# Altium PCB lab_1_demcheva_usb_rs232.PcbDoc
Units mm, origin at the board's own origin, x right, y up, seen from the top; angles counter-clockwise.
Board outline 51.05 x 32.13 mm, 4 copper layers (Top Layer, Signal Layer 1, Signal Layer 2, Bottom Layer), stack 1.522 mm thick; 26 components, 23 nets, 112 pads, 208 vias.
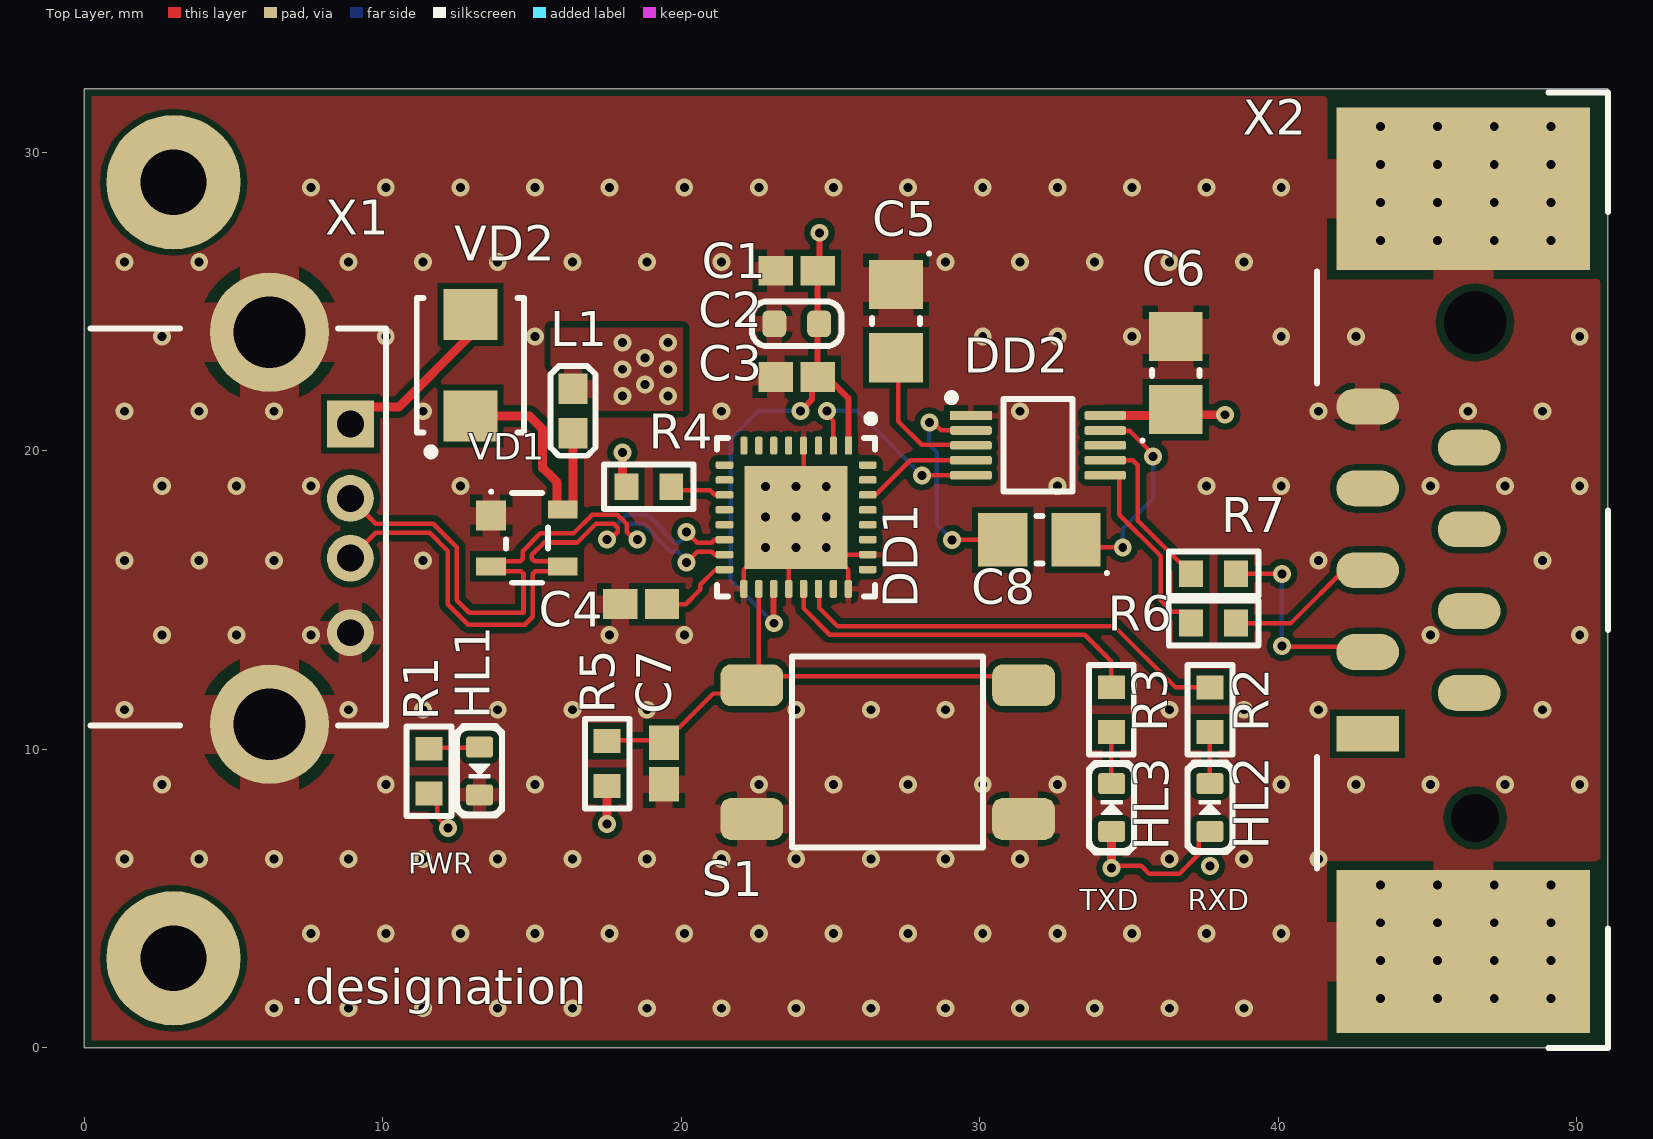
[diagram p0: Top Layer view]
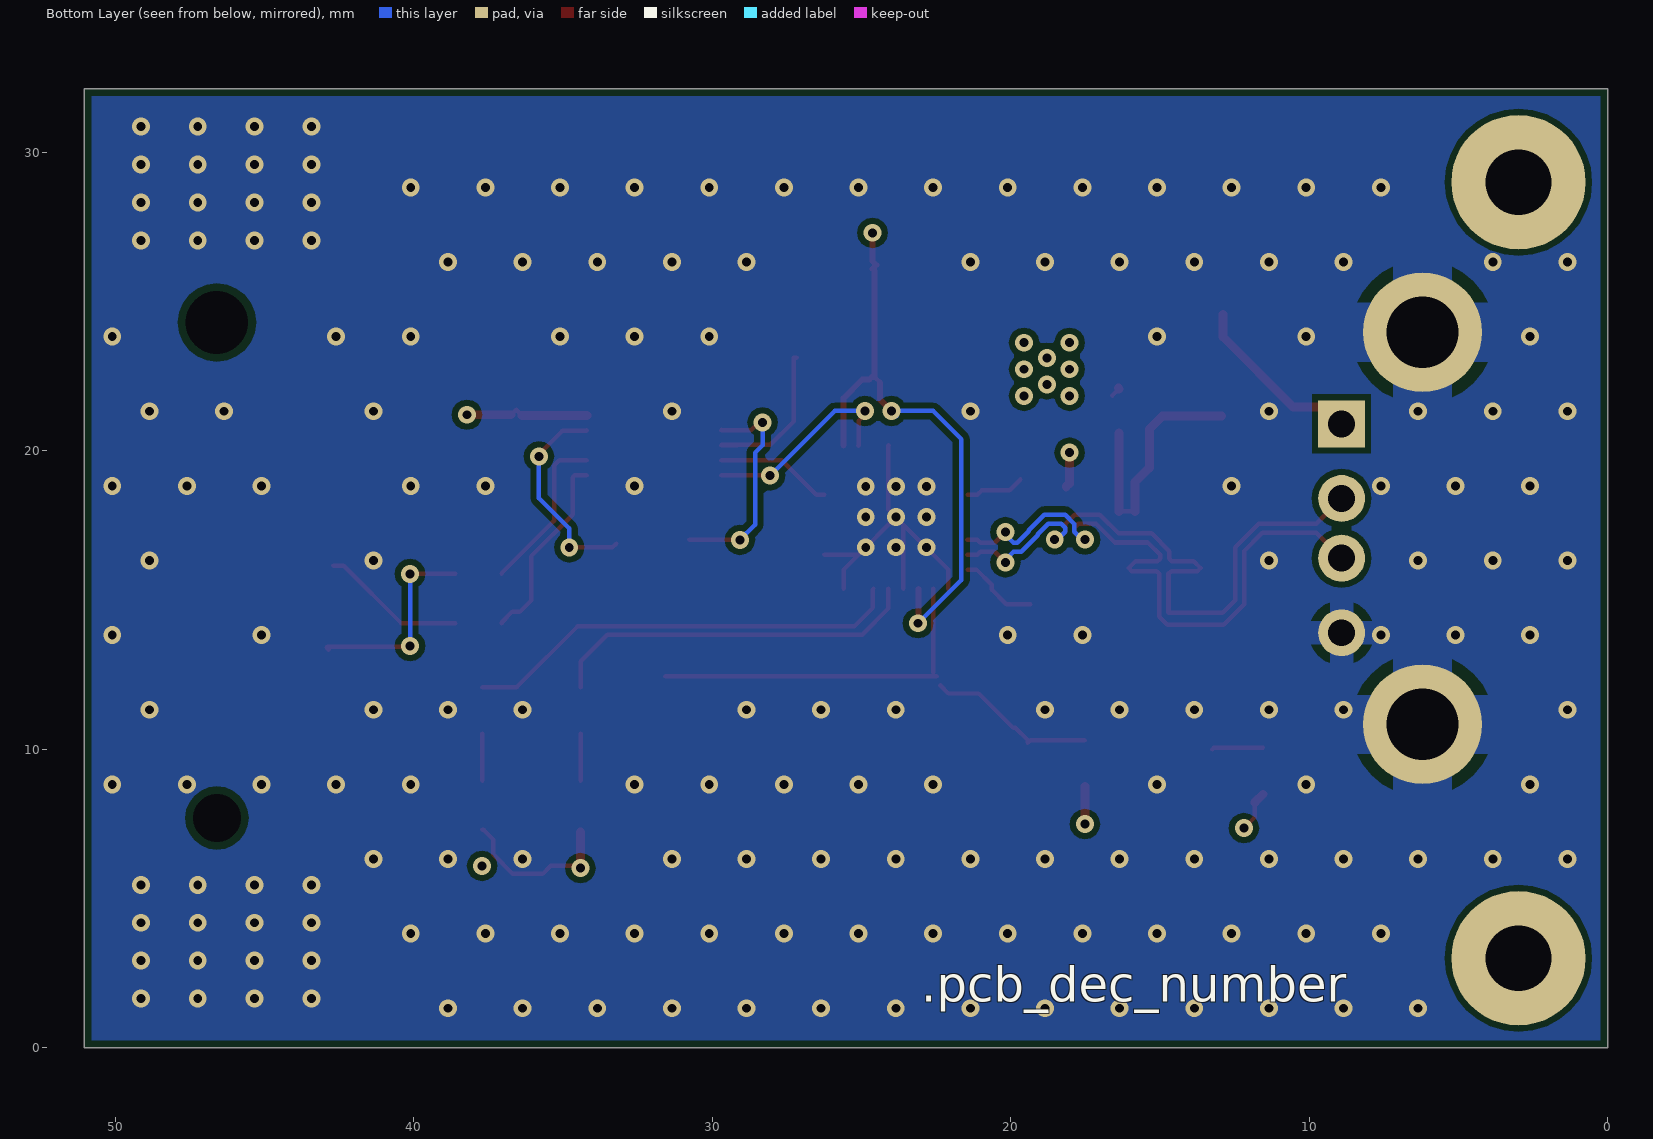
[diagram p1: Bottom Layer view, seen from below]
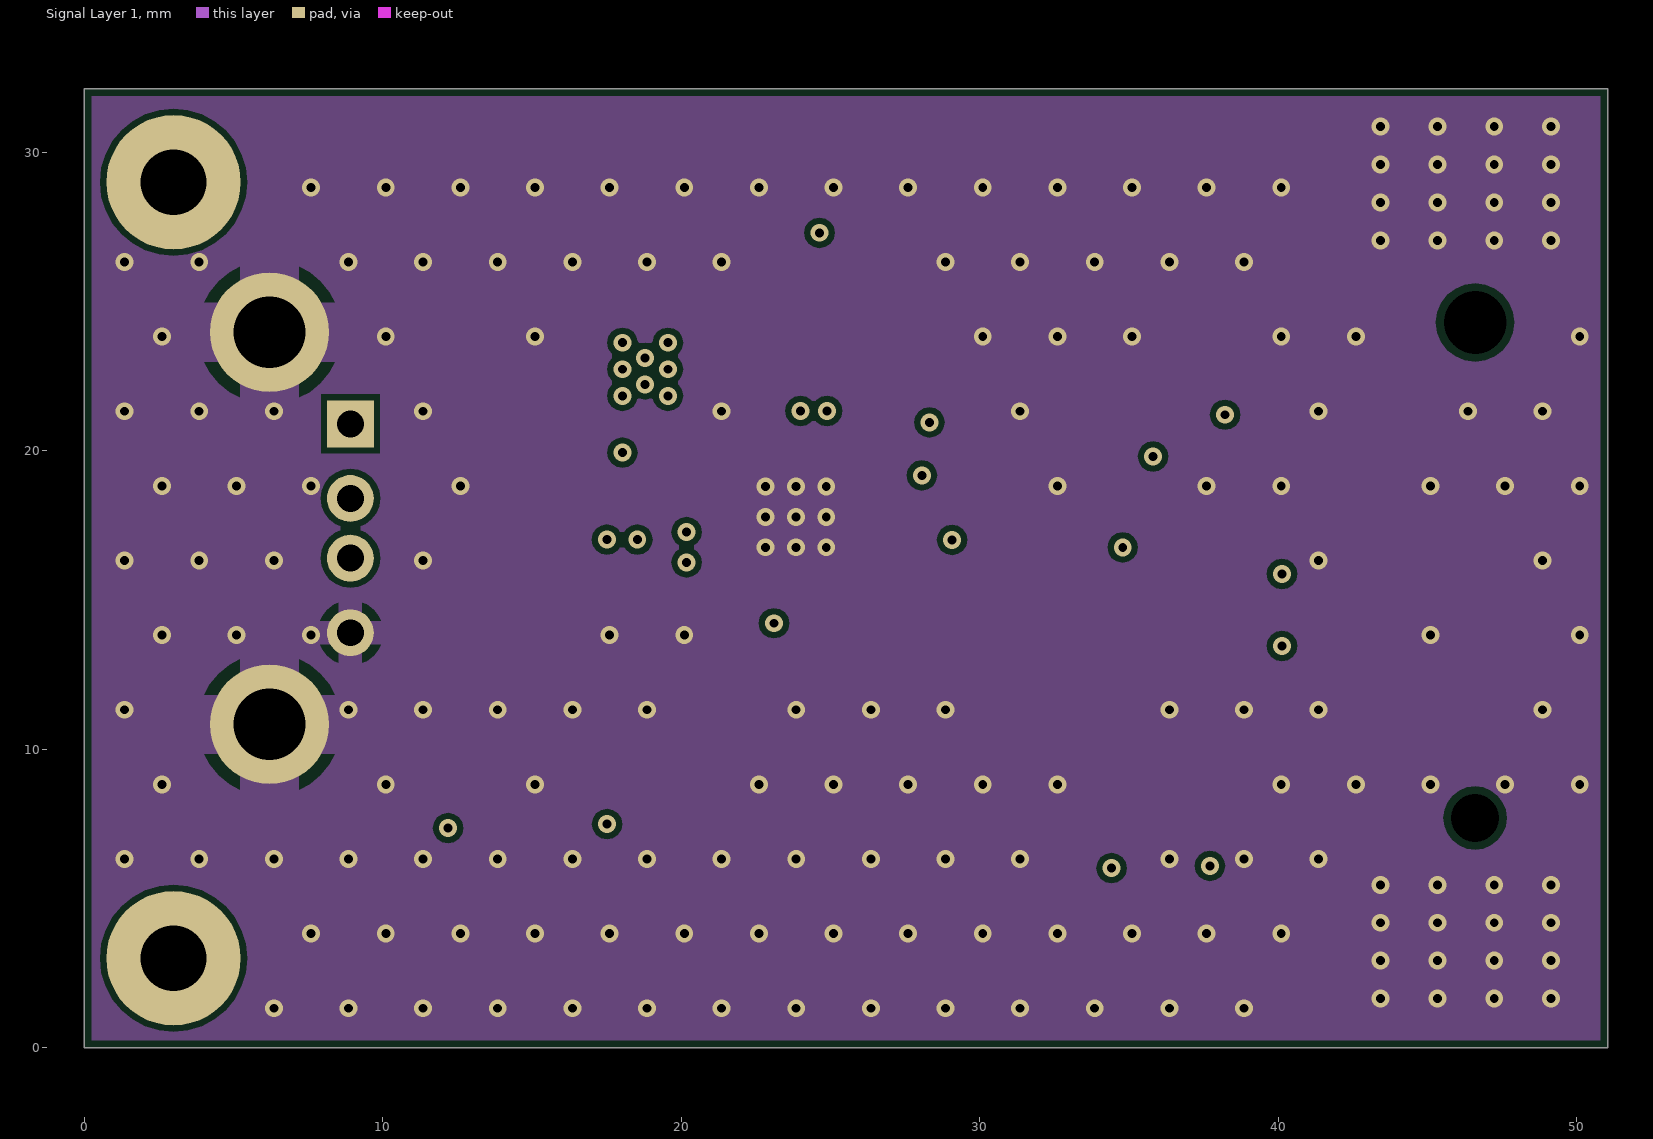
[diagram p2: Signal Layer 1]
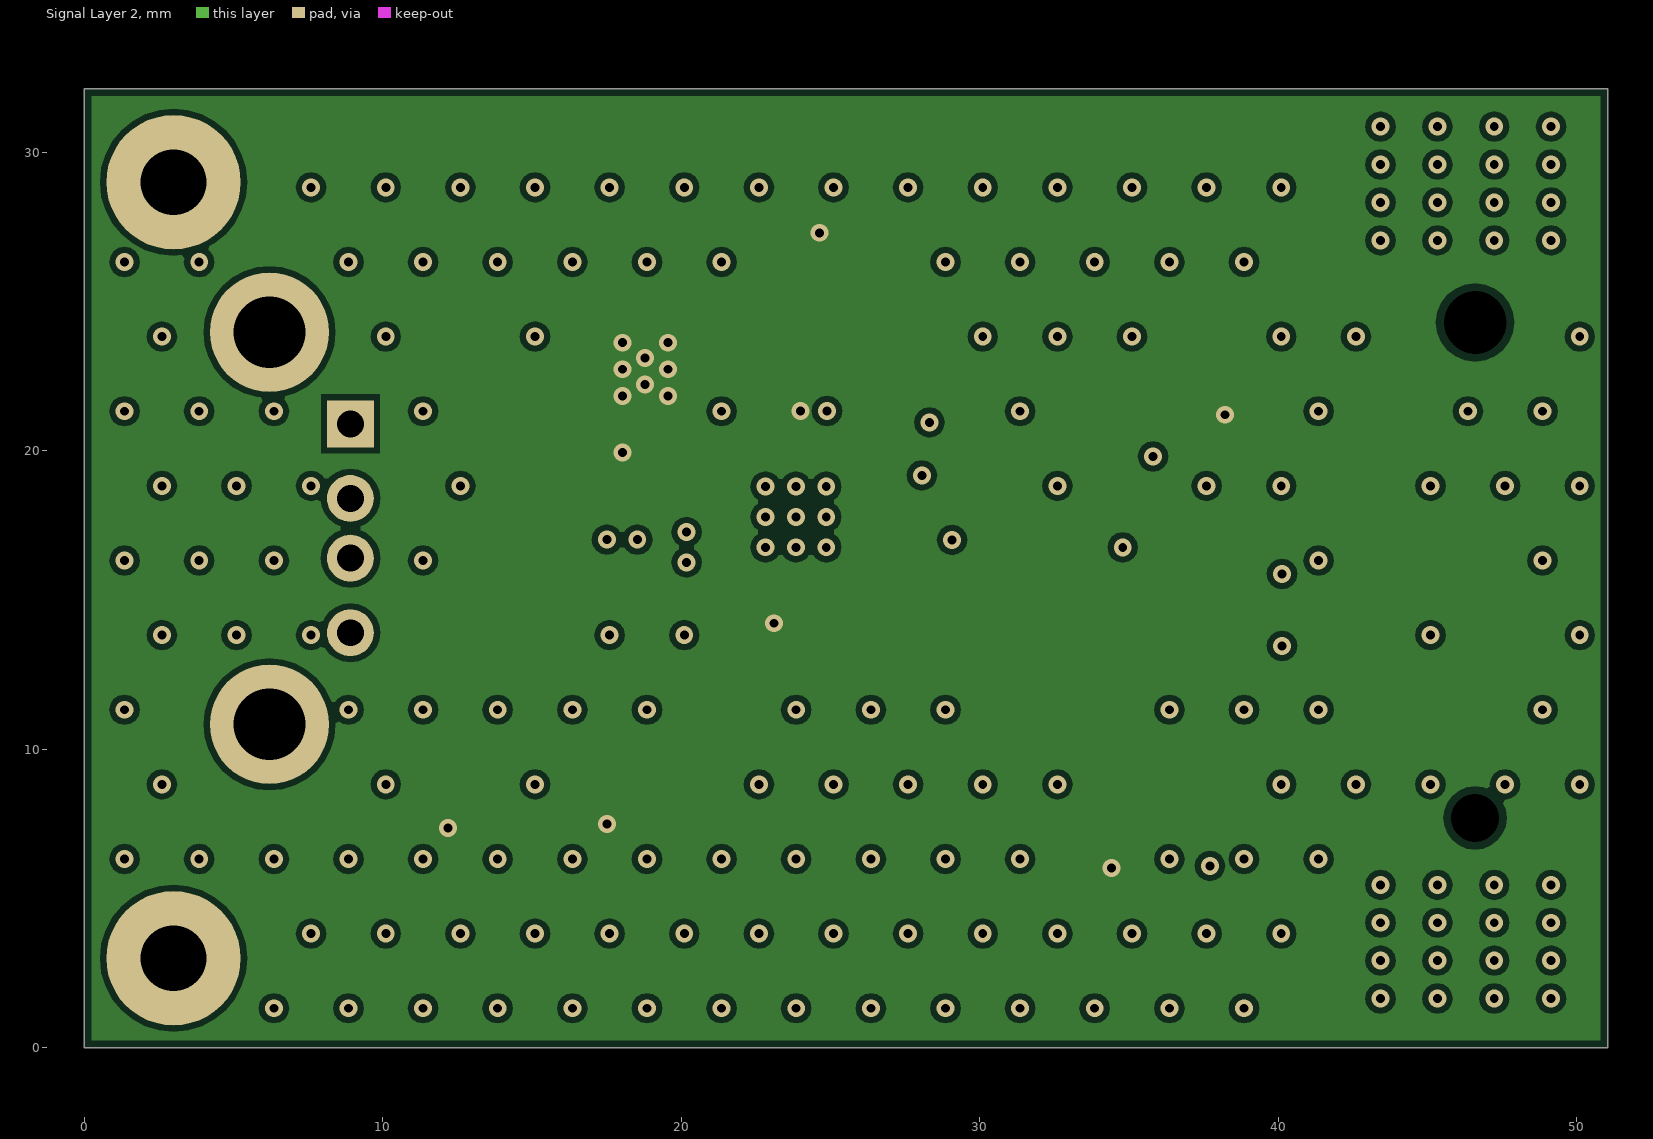
[diagram p3: Signal Layer 2]
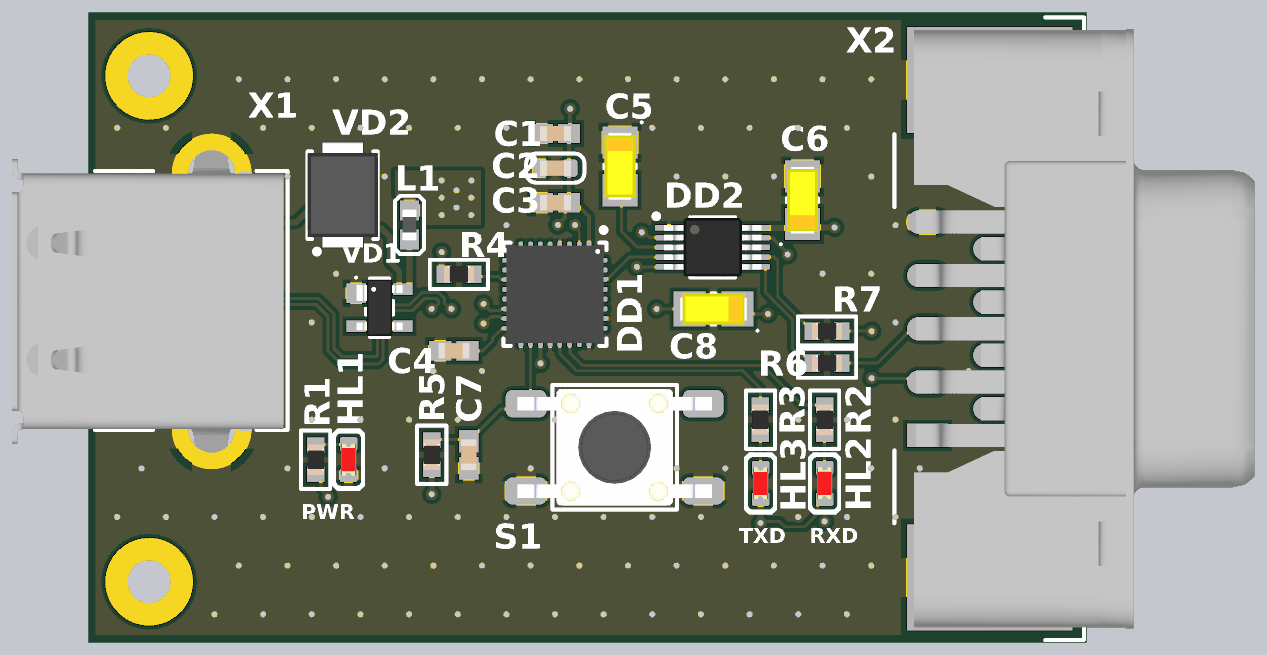
[diagram p4: 3D render of the assembled board from above, using the file's embedded part models]

## Layer stack, top to bottom
Top Solder: solder mask 0.0102, Solder Resist, Dk 3.5
Top Layer: signal copper 0.018
Prepreg 1: prepreg 0.125, FR4 HiTg170, Dk 5.07
Signal Layer 1: signal copper 0.018
Core 1: core 1.2, FR4, Dk 4.6
Signal Layer 2: signal copper 0.018
Prepreg 2: prepreg 0.125, FR4 HiTg170, Dk 5.07
Bottom Layer: signal copper 0.018
Bottom Solder: solder mask 0.0102, Solder Resist, Dk 3.5

## Board outline
0,0 0,8.033 0,32.131 51.054,32.131 51.054,0

## Design rules (kind name [scope] priority, off if disabled: settings)
AcuteAngle min_acute_angle [OnCopper] p1: minimum=3.50000000000000E+0001 checktracksonly=FALSE // Минимальный угол между примитивами топологии
BoardOutlineClearance board_outline_clearance_std [NOT (OnLayer('Bottom Overlay') OR OnLayer('Top Overlay'))] p1: gap=0.25 ignorepadtopadclearanceinfootprint=FALSE except(0: Arc-SplitContinuation Track-SplitContinuation SMDPad-SplitContinuation THPad-SplitContinuation Via-SplitContinuation Fill-SplitContinuation Poly-SplitContinuation Region-SplitContinuation Text-SplitContinuation) // Отступ элементов топологии от края фрезеруемой печатной платы
Clearance clearance_outer_18um_std [OnTopLayer OR OnBottomLayer] p1: gap=0.125 ignorepadtopadclearanceinfootprint=TRUE except(0.2: Arc-Fill Arc-Poly Track-Fill Track-Poly SMDPad-SMDPad SMDPad-Fill SMDPad-Poly THPad-Fill THPad-Poly Via-Fill Via-Poly Fill-Fill Fill-Poly Poly-Poly Poly-Region Poly-Text; 0.25: Arc-Hole Track-Hole SMDPad-Hole THPad-Hole Via-Hole Fill-Hole Poly-Hole Region-Hole Text-Hole) // Зазоры на внешних слоях
Clearance clearance_inner_18um_std [NOT (OnTopLayer Or OnBottomLayer)] p2: gap=0.125 ignorepadtopadclearanceinfootprint=FALSE except(0.2: Arc-Fill Arc-Poly Track-Fill Track-Poly SMDPad-SMDPad SMDPad-Fill SMDPad-Poly THPad-Fill THPad-Poly Via-Fill Via-Poly Fill-Fill Fill-Poly Poly-Poly Poly-Region Poly-Text; 0.25: Arc-Hole Track-Hole SMDPad-Hole THPad-Hole Via-Hole Fill-Hole Poly-Hole Region-Hole Text-Hole) // Зазоры на внутренних слоях
ComponentClearance [All] p1: gap=0 collisioncheckmode=3 verticalgap=0 showdistances=FALSE
DiffPairsRouting "Schematic Differential Pairs Routing_1" [InNet('CH_D_P')] p1: maxlimit=0.254 minlimit=0.15 mostfreqgap=0.254 toplayer_maxgap=0.15 toplayer_prefgap=0.15 toplayer_minwidth=0.155 toplayer_maxwidth=0.155 toplayer_prefwidth=0.155 bottomlayer_maxgap=0.15 bottomlayer_prefgap=0.15 bottomlayer_minwidth=0.155 bottomlayer_maxwidth=0.155 bottomlayer_prefwidth=0.155 substack1={C7A75C86-24C4-436B-B75C-D22E81B731EF} impedanceprofiledriven=TRUE impedanceprofileid={1B1F1868-2FFB-4D51-908A-913D90CA9AFC} impedanceprofilevalue=95.000000 maxuncoupledlength=12.7
DiffPairsRouting "Schematic Differential Pairs Routing" [InNet('CH_D_P')] p2: maxlimit=0.254 minlimit=0.15 mostfreqgap=0.254 toplayer_maxgap=0.15 toplayer_prefgap=0.15 toplayer_minwidth=0.155 toplayer_maxwidth=0.155 toplayer_prefwidth=0.155 bottomlayer_maxgap=0.15 bottomlayer_prefgap=0.15 bottomlayer_minwidth=0.155 bottomlayer_maxwidth=0.155 bottomlayer_prefwidth=0.155 substack1={C7A75C86-24C4-436B-B75C-D22E81B731EF} impedanceprofiledriven=TRUE impedanceprofileid={1B1F1868-2FFB-4D51-908A-913D90CA9AFC} impedanceprofilevalue=95.000000 maxuncoupledlength=12.7
HoleSize min_hole_size_std [IsPad] p1: absolutevalues=TRUE maxlimit=5.9 minlimit=0.6 maxpercent=80.000 minpercent=20.000 // Диаметр межслойного переходного отверстия
HoleSize min_hole_size_via_std [IsVia] p2: absolutevalues=TRUE maxlimit=5.9 minlimit=0.3 maxpercent=80.000 minpercent=20.000 // Минимальный диаметр монтажного отверстия
HoleToHoleClearance hole_to_hole_clearance_std [All] p1: gap=0.2 allowstackedmicrovias=FALSE // Минимальное расстояние между краями двух отверстий
MinimumAnnularRing min_via_ar_std [All] p1: minimumring=0.15 // Поясок площадки переходного отверстия (Annular ring VIA)
MinimumAnnularRing min_pad_ar_std [All] p2: minimumring=0.2 // Поясок монтажной контактной площадки (Annular ring PAD)
MinimumSolderMaskSliver min_solder_mask_bridge_std [All] p1: minsoldermaskwidth=0.15 // Мнимальная ширина масочного мостика
PlaneClearance plane_clearance_18um_std [All] p1: clearance=0.2 // Отступ полигона (для слоя plane) от элементов топологии
PlaneConnect [All] p1: planeconnectstyle=Relief reliefexpansion=0.5 reliefentries=4 reliefconductorwidth=0.2 reliefairgap=0.2
PolygonConnect poly_connect_to_pad<=0.3 [(AsMM(PadXSize_AllLayers)<=0.301) or (AsMM(PadYSize_AllLayers)<=0.301)] p1: thpad.connectstyle=Relief thpad.reliefconductorwidth=0.2 thpad.reliefentries=4 thpad.polygonreliefangle="90 Angle" thpad.airgapwidth=0.2 smdpad.connectstyle=Relief smdpad.reliefconductorwidth=0.2 smdpad.reliefentries=4 smdpad.polygonreliefangle="90 Angle" smdpad.airgapwidth=0.2 via.connectstyle=Direct via.reliefconductorwidth=0.254 via.reliefentries=4 via.polygonreliefangle="90 Angle" via.airgapwidth=0.254 // Правила подключения полигонов для падов от 0,3мм и меньше
PolygonConnect poly_connect_to_pad<=0.4 [(AsMM(PadXSize_AllLayers)<=0.401) or (AsMM(PadYSize_AllLayers)<=0.401)] p2: thpad.connectstyle=Relief thpad.reliefconductorwidth=0.26 thpad.reliefentries=4 thpad.polygonreliefangle="90 Angle" thpad.airgapwidth=0.2 smdpad.connectstyle=Relief smdpad.reliefconductorwidth=0.26 smdpad.reliefentries=4 smdpad.polygonreliefangle="90 Angle" smdpad.airgapwidth=0.2 via.connectstyle=Direct via.reliefconductorwidth=0.254 via.reliefentries=4 via.polygonreliefangle="90 Angle" via.airgapwidth=0.254 // Правила подключения полигонов для падов от 0,4 и меньше
PolygonConnect poly_connect_to_pad<=0.6 [(AsMM(PadXSize_AllLayers)<=0.601) or (AsMM(PadYSize_AllLayers)<=0.601)] p3: thpad.connectstyle=Relief thpad.reliefconductorwidth=0.33 thpad.reliefentries=4 thpad.polygonreliefangle="90 Angle" thpad.airgapwidth=0.2 smdpad.connectstyle=Relief smdpad.reliefconductorwidth=0.33 smdpad.reliefentries=4 smdpad.polygonreliefangle="90 Angle" smdpad.airgapwidth=0.2 via.connectstyle=Direct via.reliefconductorwidth=0.254 via.reliefentries=4 via.polygonreliefangle="90 Angle" via.airgapwidth=0.254 // Правила подключения полигонов для падов от 0,6мм и меньше
PolygonConnect poly_connect_to_pad<=0.7 [(AsMM(PadXSize_AllLayers)<=0.701) or (AsMM(PadYSize_AllLayers)<=0.701)] p4: thpad.connectstyle=Relief thpad.reliefconductorwidth=0.46 thpad.reliefentries=4 thpad.polygonreliefangle="90 Angle" thpad.airgapwidth=0.2 smdpad.connectstyle=Relief smdpad.reliefconductorwidth=0.46 smdpad.reliefentries=4 smdpad.polygonreliefangle="90 Angle" smdpad.airgapwidth=0.2 via.connectstyle=Direct via.reliefconductorwidth=0.254 via.reliefentries=4 via.polygonreliefangle="90 Angle" via.airgapwidth=0.254 // Правила подключения полигонов для падов от 0,7мм и меньше
PolygonConnect poly_connect_to_pad<=0.8 [(AsMM(PadXSize_AllLayers)<=0.8)or(AsMM(PadYSize_AllLayers)<=0.8)] p5: thpad.connectstyle=Relief thpad.reliefconductorwidth=0.53 thpad.reliefentries=4 thpad.polygonreliefangle="90 Angle" thpad.airgapwidth=0.3 smdpad.connectstyle=Relief smdpad.reliefconductorwidth=0.53 smdpad.reliefentries=4 smdpad.polygonreliefangle="90 Angle" smdpad.airgapwidth=0.2 via.connectstyle=Direct via.reliefconductorwidth=0.254 via.reliefentries=4 via.polygonreliefangle="90 Angle" via.airgapwidth=0.254 // Правила подключения полигонов для падов от 0,8мм и меньше
PolygonConnect poly_connect_to_pad<=1 [(AsMM(PadXSize_AllLayers)<=1.01)or(AsMM(PadYSize_AllLayers)<=1.01)] p6: thpad.connectstyle=Relief thpad.reliefconductorwidth=0.6 thpad.reliefentries=4 thpad.polygonreliefangle="90 Angle" thpad.airgapwidth=0.3 smdpad.connectstyle=Relief smdpad.reliefconductorwidth=0.6 smdpad.reliefentries=4 smdpad.polygonreliefangle="90 Angle" smdpad.airgapwidth=0.2 via.connectstyle=Direct via.reliefconductorwidth=0.254 via.reliefentries=4 via.polygonreliefangle="90 Angle" via.airgapwidth=0.254 // Правила подключения полигонов для падов от 1мм и меньше
PolygonConnect poly_connect_to_pad<=1.3 [(AsMM(PadXSize_AllLayers)<=1.31)or(AsMM(PadYSize_AllLayers)<=1.31)] p7: thpad.connectstyle=Relief thpad.reliefconductorwidth=0.66 thpad.reliefentries=4 thpad.polygonreliefangle="90 Angle" thpad.airgapwidth=0.3 smdpad.connectstyle=Relief smdpad.reliefconductorwidth=0.86 smdpad.reliefentries=4 smdpad.polygonreliefangle="90 Angle" smdpad.airgapwidth=0.2 via.connectstyle=Direct via.reliefconductorwidth=0.254 via.reliefentries=4 via.polygonreliefangle="90 Angle" via.airgapwidth=0.254 // Правила подключения полигонов для падов от 1,3мм и меньше
PolygonConnect poly_connect_to_pad<=1.6 [(AsMM(PadXSize_AllLayers)<=1.61)or(AsMM(PadYSize_AllLayers)<=1.61)] p8: thpad.connectstyle=Relief thpad.reliefconductorwidth=0.8 thpad.reliefentries=4 thpad.polygonreliefangle="90 Angle" thpad.airgapwidth=0.3 smdpad.connectstyle=Relief smdpad.reliefconductorwidth=1 smdpad.reliefentries=4 smdpad.polygonreliefangle="90 Angle" smdpad.airgapwidth=0.2 via.connectstyle=Direct via.reliefconductorwidth=0.254 via.reliefentries=4 via.polygonreliefangle="90 Angle" via.airgapwidth=0.254 // Правила подключения полигонов для падов от 1,6мм и меньше
PolygonConnect poly_connect_to_pad<=1.8 [(AsMM(PadXSize_AllLayers)<=1.8)or(AsMM(PadYSize_AllLayers)<=1.8)] p9: thpad.connectstyle=Relief thpad.reliefconductorwidth=1 thpad.reliefentries=4 thpad.polygonreliefangle="90 Angle" thpad.airgapwidth=0.3 smdpad.connectstyle=Relief smdpad.reliefconductorwidth=1.2 smdpad.reliefentries=4 smdpad.polygonreliefangle="90 Angle" smdpad.airgapwidth=0.2 via.connectstyle=Direct via.reliefconductorwidth=0.254 via.reliefentries=4 via.polygonreliefangle="90 Angle" via.airgapwidth=0.254 // Правила подключения полигонов для падов от 1,8мм и меньше
PolygonConnect poly_connect_to_pad<=2 [(AsMM(PadXSize_AllLayers)<=2.01)or(AsMM(PadYSize_AllLayers)<=2.01)] p10: thpad.connectstyle=Relief thpad.reliefconductorwidth=1.1 thpad.reliefentries=4 thpad.polygonreliefangle="90 Angle" thpad.airgapwidth=0.3 smdpad.connectstyle=Relief smdpad.reliefconductorwidth=1.4 smdpad.reliefentries=4 smdpad.polygonreliefangle="90 Angle" smdpad.airgapwidth=0.2 via.connectstyle=Direct via.reliefconductorwidth=0.254 via.reliefentries=4 via.polygonreliefangle="90 Angle" via.airgapwidth=0.254 // Правила подключения полигонов для падов от 2мм и меньше
PolygonConnect poly_connect_to_pad<=2.3 [(AsMM(PadXSize_AllLayers)<=2.31)or(AsMM(PadYSize_AllLayers)<=2.31)] p11: thpad.connectstyle=Relief thpad.reliefconductorwidth=1.2 thpad.reliefentries=4 thpad.polygonreliefangle="90 Angle" thpad.airgapwidth=0.3 smdpad.connectstyle=Relief smdpad.reliefconductorwidth=1.4 smdpad.reliefentries=4 smdpad.polygonreliefangle="90 Angle" smdpad.airgapwidth=0.2 via.connectstyle=Direct via.reliefconductorwidth=0.254 via.reliefentries=4 via.polygonreliefangle="90 Angle" via.airgapwidth=0.254 // Правила подключения полигонов для падов от 2,3мм и меньше
PolygonConnect poly_connect_to_pad<=2.5 [(AsMM(PadXSize_AllLayers)<=2.51)or(AsMM(PadYSize_AllLayers)<=2.51)] p12: thpad.connectstyle=Relief thpad.reliefconductorwidth=1.2 thpad.reliefentries=4 thpad.polygonreliefangle="90 Angle" thpad.airgapwidth=0.3 smdpad.connectstyle=Relief smdpad.reliefconductorwidth=1.4 smdpad.reliefentries=4 smdpad.polygonreliefangle="90 Angle" smdpad.airgapwidth=0.2 via.connectstyle=Direct via.reliefconductorwidth=0.254 via.reliefentries=4 via.polygonreliefangle="90 Angle" via.airgapwidth=0.254 // Правила подключения полигонов для падов от 2,5мм и меньше
PolygonConnect poly_connect_to_pad<=2.7 [(AsMM(PadXSize_AllLayers)<=2.71)or(AsMM(PadYSize_AllLayers)<=2.71)] p13: thpad.connectstyle=Relief thpad.reliefconductorwidth=1.4 thpad.reliefentries=4 thpad.polygonreliefangle="90 Angle" thpad.airgapwidth=0.3 smdpad.connectstyle=Relief smdpad.reliefconductorwidth=1.6 smdpad.reliefentries=4 smdpad.polygonreliefangle="90 Angle" smdpad.airgapwidth=0.2 via.connectstyle=Direct via.reliefconductorwidth=0.254 via.reliefentries=4 via.polygonreliefangle="90 Angle" via.airgapwidth=0.254 // Правила подключения полигонов для падов от 2,7мм и меньше
PolygonConnect poly_connect_to_pad<=3 [(AsMM(PadXSize_AllLayers)<=3.01)or(AsMM(PadYSize_AllLayers)<=3.01)] p14: thpad.connectstyle=Relief thpad.reliefconductorwidth=1.6 thpad.reliefentries=4 thpad.polygonreliefangle="90 Angle" thpad.airgapwidth=0.3 smdpad.connectstyle=Relief smdpad.reliefconductorwidth=1.8 smdpad.reliefentries=4 smdpad.polygonreliefangle="90 Angle" smdpad.airgapwidth=0.2 via.connectstyle=Direct via.reliefconductorwidth=0.254 via.reliefentries=4 via.polygonreliefangle="90 Angle" via.airgapwidth=0.254 // Правила подключения полигонов для падов от 3мм и меньше
PolygonConnect poly_connect_to_pad<=7 [(AsMM(PadXSize_AllLayers)<7.01)or(AsMM(PadYSize_AllLayers)<=7.01)] p15: thpad.connectstyle=Relief thpad.reliefconductorwidth=2 thpad.reliefentries=4 thpad.polygonreliefangle="90 Angle" thpad.airgapwidth=0.4 smdpad.connectstyle=Relief smdpad.reliefconductorwidth=2 smdpad.reliefentries=4 smdpad.polygonreliefangle="90 Angle" smdpad.airgapwidth=0.3 via.connectstyle=Direct via.reliefconductorwidth=0.254 via.reliefentries=4 via.polygonreliefangle="90 Angle" via.airgapwidth=0.254 // Правила подключения полигонов для падов от 7мм и меньше
PolygonConnect poly_connect_to_pad [All] p16: thpad.connectstyle=Relief thpad.reliefconductorwidth=0.25 thpad.reliefentries=4 thpad.polygonreliefangle="90 Angle" thpad.airgapwidth=0.2 smdpad.connectstyle=Relief smdpad.reliefconductorwidth=0.25 smdpad.reliefentries=4 smdpad.polygonreliefangle="90 Angle" smdpad.airgapwidth=0.2 via.connectstyle=Direct via.reliefconductorwidth=0.25 via.reliefentries=4 via.polygonreliefangle="90 Angle" via.airgapwidth=0.2 // Правила подключения полигонов общие
RoutingCorners [All] p1 off: cornerstyle=45-Degree minsetback=2.5 maxsetback=2.5
RoutingVias [All] p1: holewidth=0.3 width=0.6 viastyle="Through Hole" minholewidth=0.3 minwidth=0.6 maxholewidth=5.9 maxwidth=6.4
SilkToSilkClearance silk_to_silk_clearance_std [All] p1: silktosilkclearance=0.15 // Отступ текста шелкографии от других примитивов шелкографии
SilkToSolderMaskClearance silk_to_solder_mask_clearance_std [IsPad] p1: minsilkscreentomaskgap=0.15 clearancetoexposedcopper=FALSE // Минимальное расстояние между элементами шелкографии и вскрытой медью
SolderMaskExpansion solder_mask_expansion_std [All] p1: expansion=0.05 // Припуск паяльной масски
UnRoutedNet [All] p1: checkbadconnections=TRUE
Width width_18um_std [All] p1: maxlimit=10 minlimit=0.125 preferedwidth=0.15 checkconnectedcopper=TRUE // Ширина проводников (общая)
19 further rules are at their usual default settings.

## Classes and differential pairs
differential pair class USB_SIGNALS: CH_D
component class lab_1_demcheva_usb_rs232: C1 C2 C3 C4 C5 C6 C7 C8 DD1 DD2 HL1 L1 R1 R6 R7 S1 VD2 X1 X2
differential pair CH_D: +CH_D_P -CH_D_N

## Components (designator, comment, footprint, x,y, rotation, side; value= is the part's Value field where it differs from the comment)
C1 "4,7 мк" C0603#1 23.876,26.035 r180 top
C2 "1 мк" C0603#2 23.876,24.257 r180 top
C3 "0,1 мк" C0603#1 23.876,22.479 r180 top
C4 "0,1 мк" C0603#1 18.662,14.865 r180 top
C5 "0,1 мк" C1206POLAR 27.201,24.345 r270 top
C6 "0,1 мк" C1206POLAR 36.576,22.606 r90 top
C7 "0,1 мк" C0603#1 19.431,9.525 r270 top
C8 "0,1 мк" C1206POLAR 32.004,17.018 r180 top
DD1 "FT232RQ" QFN-32-500x500x90 23.856,17.774 r270 top
DD2 "ADM101EARM" MSOP-10 31.961,20.183 r0 top
HL1 "TLMG1100-GS08" HL0603 13.25,9.275 r90 top
HL2 "TLMY1000-GS08" HL0603 37.719,8.053 r270 top
HL3 "TLMS1000-GS08" HL0603 34.425,8.05 r270 top
L1 "BLM18KG221SH1D" BLM-2-0603 16.383,21.336 r90 top
R1 "100" R0603 11.557,9.271 r270 top
R2 "220" R0603 37.719,11.328 r270 top
R3 "220" R0603 34.417,11.328 r270 top
R4 "10 к" R0603 18.923,18.796 r180 top
R5 "10 к" R0603 17.526,9.525 r270 top
R6 "100" R0603 37.839,14.23 r0 top
R7 "100" R0603 37.839,15.881 r0 top
S1 "FSM4JSMA" FSM4JSMA 26.924,9.906 r180 top
VD1 "CD143A-SR05" SOT-143-4 14.84,17.081 r0 top (schematic designator VD?)
VD2 "SL13-E3/5AT" DO-214AC 12.947,22.866 r90 top
X1 "292303-5" 292303-5 2.914,17.405 r270 top
X2 "1-1740194-2" 1-1740194-2 50.803,16.001 r270 top

## Footprints (in the part's own frame and the unit in brackets; to place one, negate y for a bottom-side part, rotate by r counter-clockwise, add the part's x,y. Pads: shape width x height; smd on the part's side, far side on the other; paste and mask are expansions set on the pad)
1-1740194-2 [mm]
  rect 1.2x2.1 smd: 1(5.48,-7.8)
  oval 1.2x2.1 smd: 2(2.74,-7.8) 3(0,-7.8) 4(-2.74,-7.8) 5(-5.48,-7.8) 6(4.11,-4.4) 7(1.37,-4.4) 8(-1.37,-4.4) 9(-4.11,-4.4)
  rect 5.45x8.5 smd: TP1(-12.775,-4.6) TP1(12.775,-4.6)
  round 0 hole 2.1: ""(-8.3,-4.2)
  round 0 hole 1.6: ""(8.3,-4.2)
  silkscreen extent -16,-9.5 16,0.25, body extent -15.4,-8.5 15.4,9, height 9.87
292303-5 [mm]
  rect 1.57x1.57 hole 0.9: 1(-3.5,6.01)
  round 1.57 hole 0.9: 2(-1,6.01) 3(1,6.01) 4(3.5,6.01)
  round 4 hole 2.4: TP1(-6.57,3.3) TP1(6.57,3.3)
  silkscreen extent -6.7,-2.7 6.6,7.2, body extent -8.12,-7 8.12,7, height 7.77
BLM-2-0603 [mm] "Chip Inductor, 2-Leads, Body 1,60x0,80mm, IPC Medium Density"
  rect 1.02x0.98 smd: 1(-0.74,0) 2(0.74,0)
  silkscreen extent -1.5,-0.75 1.5,0.75, body extent -0.8,-0.37 0.8,0.38, height 0.8
C0603#1 [mm] "Chip Capacitor, 2-Leads, Body 1,60x0,80mm, IPC Medium Density"
  rect 1.15x1 smd: 1(-0.7,0) 2(0.7,0)
  body extent -0.8,-0.4 0.8,0.4, height 0.8
C0603#2 [mm] "Chip Capacitor, 2-Leads, Body 1,60x0,80mm, IPC Medium Density"
  rrect50% 0.8x0.9 smd: 1(-0.75,0) 2(0.75,0)
  silkscreen extent -1.5,-0.75 1.5,0.75, body extent -0.8,-0.4 0.8,0.4, height 0.8
C1206POLAR [mm] "Chip Capacitor, 2-Leads, Body 3,20x1,60mm, IPC Medium Density"
  rect 1.65x1.8 smd: 1(-1.225,0) 2(1.225,0)
  silkscreen extent -2.31,-0.8 0.1,1.16, body extent -1.73,-0.8 1.73,0.8, height 1.65
DO-214AC [mm] "Molded Diode, 2-Leads, Body 4,25x2,67mm, IPC Medium Density"
  rect 1.7x1.8 smd: 1(-1.7,0) 2(1.7,0)
  silkscreen extent -3.02,-1.8 2.25,1.8, body extent -2.7,-1.81 2.7,1.81, height 2.43
FSM4JSMA [mm]
  rrect50% 2.1x1.4 smd: 1(-4.55,2.24) 1(4.55,2.24) 2(-4.55,-2.24) 2(4.55,-2.24)
  silkscreen extent -3.2,-3.2 3.2,3.2, body extent -5,-3 5,3, height 5.13
HL0603 [mm] "Chip Resistor, 2-Leads, Body 1,60x0,80mm, IPC Medium Density"
  rrect25% 0.7x0.9 smd: 1(-0.8,0) 2(0.8,0)
  silkscreen extent -1.5,-0.75 1.5,0.75, body extent -0.81,-0.4 0.81,0.4, height 0.64
MSOP-10 [mm] "TSSOP, 10-Leads, Body 3,00x3,00mm, Pitch 0,50mm, IPC Medium Density"
  rect 1.4x0.29 smd: 1(-2.25,1)
  rrect50% 1.4x0.29 smd: 2(-2.25,0.5) 3(-2.25,0) 4(-2.25,-0.5) 5(-2.25,-1) 6(2.25,-1) 7(2.25,-0.5) 8(2.25,0) 9(2.25,0.5) 10(2.25,1)
  silkscreen extent -3.02,-1.55 1.15,1.72, body extent -2.51,-1.5 2.51,1.5, height 1.05
QFN-32-500x500x90 [mm] "QFN, 32-Leads, Body 5,00x5,00mm, Pitch 0,50mm, Thermal Pad 3,30x3,30mm, IPC Medium Density"
  rect 3.45x3.45 smd: 0(0,0)
  rect 0.6x0.24 smd: 1(-2.4,1.75)
  rrect50% 0.6x0.24 smd: 2(-2.4,1.25) 3(-2.4,0.75) 4(-2.4,0.25) 5(-2.4,-0.25) 6(-2.4,-0.75) 7(-2.4,-1.25) 8(-2.4,-1.75)
  rrect50% 0.25x0.6 smd: 9(-1.75,-2.4) 10(-1.25,-2.4) 11(-0.75,-2.4) 12(-0.25,-2.4) 13(0.25,-2.4) 14(0.75,-2.4) 15(1.25,-2.4) 16(1.75,-2.4) 25(1.75,2.4) 26(1.25,2.4) 27(0.75,2.4) 28(0.25,2.4) 29(-0.25,2.4) 30(-0.75,2.4) 31(-1.25,2.4) 32(-1.75,2.4)
  rrect50% 0.6x0.25 smd: 17(2.4,-1.75) 18(2.4,-1.25) 19(2.4,-0.75) 20(2.4,-0.25) 21(2.4,0.25) 22(2.4,0.75) 23(2.4,1.25) 24(2.4,1.75)
  silkscreen extent -3.42,-2.65 2.65,2.65, body extent -2.5,-2.51 2.5,2.5, height 1
R0603 [mm] "Chip Resistor, 2-Leads, Body 1,60x0,80mm, IPC Medium Density"
  rect 0.8x0.9 smd: 1(-0.75,0) 2(0.75,0)
  silkscreen extent -1.5,-0.75 1.5,0.75, body extent -0.77,-0.43 0.78,0.43, height 0.43
SOT-143-4 [mm] "SOT143, 4-Leads, Body 2,92x2,37mm, Pitch 1,90mm, IPC Medium Density"
  rect 1x1 smd: 1(-1.2,0.75)
  rect 1x0.6 smd: 2(-1.2,-0.95) 3(1.2,-0.95) 4(1.2,0.95)
  silkscreen extent -1.25,-1.5 0.7,1.6, body extent -1.18,-1.45 1.18,1.45, height 1.22

## Part data
C1: library part c0009, "=Описание", HelpURL=https://www.yageo.com/upload/media/product/productsearch/datasheet/mlcc/UPY-GPHC_X5R_4V-to-50V_26.pdf, id=c0009, Корпус=0603, Наименование=CC0603KRX5R8BB475, Номинал="4,7 мк", Номинальное напряжение="25 В", Описание="Конденсатор чип 0603 4,7 мкФ 25 В ±10 %", Отклонение="±10 %", Производитель=Yageo, Рабочие температуры="от -55 °С до +85 °С", Фамилия=Ларионов
C2: library part c0007, "=Описание", HelpURL=https://www.yageo.com/upload/media/product/products/datasheet/mlcc/UPY-GPHC_X7R_6.3V-to-50V_20.pdf, id=c0007, Корпус=0603, Наименование=CC0603KRX7R8BB105, Номинал="1 мк", Номинальное напряжение="25 В", Описание="Конденсатор чип 0603 1 мкФ 25 В ±10 %", Отклонение="±10 %", Производитель=Yageo, Рабочие температуры="от -55 °С до +125 °С", Фамилия=Ларионов
C3 C4 C7: library part c0005, "=Описание", HelpURL=https://www.yageo.com/upload/media/product/products/datasheet/mlcc/UPY-GPHC_X7R_6.3V-to-50V_20.pdf, id=c0005, Корпус=0603, Наименование=CC0603JRX7R9BB104, Номинал="0,1 мк", Номинальное напряжение="50 В", Описание="Конденсатор чип 0603 0,1 мкФ 50 В ±5 %", Отклонение="±5 %", Производитель=Yageo, Рабочие температуры="от -55 °С до +125 °С", Фамилия=Ларионов
C5 C6 C8: library part c0011, "=Описание", HelpURL=https://www.vishay.com/capacitors/list/product-40002/, id=c0011, Корпус=1206, Наименование=293D104X9050A2TE3, Номинал="0,1 мк", Номинальное напряжение="50 В", Описание="Конденсатор чип 1206 0,1 мкФ 50 В ±10 % полярный", Отклонение="±10 %", Производитель="Vishay Intertechnology, Inc.", Рабочие температуры="от -55 °С до +125 °С", Фамилия=Ларионов
DD1: library part dd0013, "=Описание", HelpURL=https://www.ftdichip.com/Products/ICs/FT232R.htm, id=dd0013, Корпус=QFN-32, Наименование=FT232RQ, Описание="Преобразователь USB-UART", Производитель="FTDI Limited", Фамилия=Демчева
DD2: library part dd0008, "=Описание", HelpURL=https://www.analog.com/ru/products/adm101e.html#product-documentation, id=dd0008, Корпус=MSOP-10, Наименование=ADM101EARM, Описание="Приемопередатчик RS-232", Производитель="Analog Devices, Inc.", Фамилия=Демчева
HL1: library part hl0005, "=Описание", HelpURL=https://www.vishay.com/leds/list/product-83173/, id=hl0005, Корпус=0603, Наименование=TLMG1100-GS08, Номинальная длина волны="570 нм", Номинальная сила света="35 мкд", Номинальное падение напряжения="2,1 В", Номинальный прямой ток="30 мА", Описание="Светодиод чип 0603 зеленый", Производитель="Vishay Intertechnology, Inc.", Рабочие температуры="от -40 °С до +100 °С", Рассеиваемая мощность="90 мВт", Фамилия=Ларионов, Цвет=Green
HL2: library part hl0003, "=Описание", HelpURL=https://www.vishay.com/leds/list/product-83172/, id=hl0003, Корпус=0603, Наименование=TLMY1000-GS08, Номинальная длина волны="588 нм", Номинальная сила света="7,5 мкд", Номинальное падение напряжения="1,8 В", Номинальный прямой ток="15 мА", Описание="Светодиод чип 0603 желтый", Производитель="Vishay Intertechnology, Inc.", Рабочие температуры="от -40 °С до +100 °С", Рассеиваемая мощность="40 мВт", Фамилия=Ларионов, Цвет=Yellow
HL3: library part hl0001, "=Описание", HelpURL=https://www.vishay.com/leds/list/product-83172/, id=hl0001, Корпус=0603, Наименование=TLMS1000-GS08, Номинальная длина волны="628 нм", Номинальная сила света="4 мкд", Номинальное падение напряжения="1,8 В", Номинальный прямой ток="15 мА", Описание="Светодиод чип 0603 красный", Производитель="Vishay Intertechnology, Inc.", Рабочие температуры="от -40 °С до +100 °С", Рассеиваемая мощность="40 мВт", Фамилия=Ларионов, Цвет=Red
L1: library part l0001, "=Описание", HelpURL=https://www.murata.com/en-global/products/productdetail.aspx?partno=BLM18KG221SH1%23, id=l0001, Корпус=0603, Наименование=BLM18KG221SH1D, Описание="Ферритовая бусина 220 Ом ±25 %", Отклонение, 100 Мгц="±25 %", Производитель="Murata Manufacturing Co., Ltd.", Рабочие температуры="от -55 °С до +125 °С", Сопротивление, 100 МГц="220 Ом", Сопротивление при постоянном токе="0,05 Ом", Фамилия=Ларионов
R1 R6 R7: library part r0006, "=Описание", HelpURL=https://www.yageo.com/upload/media/product/productsearch/datasheet/rchip/PYu-RC_Group_51_RoHS_L_11.pdf, id=r0006, Корпус=0603, Наименование=RC0603FR??07100RL, Номинал=100, Номинальное напряжение="75 В", Номинальный ток="1 А", Описание="Резистор чип 0603 100 Ом ±1 % 0,1 Вт", Отклонение="±1 %", Производитель=Yageo, Рабочие температуры="от -55 °С до +155 °С", Фамилия=Самарин
R2 R3: library part r0008, "=Описание", HelpURL=https://www.yageo.com/upload/media/product/productsearch/datasheet/rchip/PYu-RC_Group_51_RoHS_L_11.pdf, id=r0008, Корпус=0603, Наименование=RC0603FR-07220RL, Номинал=220, Номинальное напряжение="75 В", Номинальный ток="1 А", Описание="Резистор чип 0603 220 Ом ±1 % 0,1 Вт", Отклонение="±1 %", Производитель=Yageo, Рабочие температуры="от -55 °С до +155 °С", Фамилия=Ларионов
R4 R5: library part r0012, "=Описание", HelpURL=https://www.yageo.com/upload/media/product/productsearch/datasheet/rchip/PYu-RC_Group_51_RoHS_L_11.pdf, id=r0012, Корпус=0603, Наименование=RC0603FR-0710KL, Номинал="10 к", Номинальное напряжение="75 В", Номинальный ток="1 А", Описание="Резистор чип 0603 10 кОм ±1 % 0,1 Вт", Отклонение="±1 %", Производитель=Yageo, Рабочие температуры="от -55 °С до +155 °С", Фамилия=Самарин
S1: library part sw0002, "=Описание", HelpURL=https://www.te.com/usa-en/product-4-1437565-1.html, id=sw0002, Количество контактов=1, Корпус=6,00x6,00x4,98, Наименование=FSM4JSMA, Описание="Тактовая кнопка поверхностного монтажа", Производитель="TE Connectivity", Промывка=Разрешена, Рабочие температуры="от –35 °С до +85 °С", Сопротивление контакта="100 мОм", Ток нагрузки="50 мА @ 24 В", Фамилия=Паньков
VD1: library part vd0013, "=Описание", HelpURL=https://www.bourns.com/products/diodes/diode-arrays/product/CD143A-SR05%20~%2012, id=vd0013, Корпус=SOT-143-5, Наименование=CD143A-SR05, Описание="Диодная сборка для подавления помех, 5 В", Производитель=Boutns, Фамилия=Демчева
VD2: library part vd0001, "=Описание", HelpURL=https://www.vishay.com/product?docid=88740, id=vd0001, Импульсное обратное напряжение="30 В", Корпус=DO-214AC, Макс допустимый средний прямой ток="1,5 А", Наименование=SL13-E3/5AT, Описание="Диод Шоттки 30 В 1,5 А", Пиковое прямое напряжение="0,445 В", Производитель="Vishay Intertechnology, Inc.", Рабочие температуры="от -55 °С до +125 °С", Фамилия=Ларионов
X1: library part x0003, "=Описание", Contact_1=VBUS, Contact_2=D-, Contact_3=D+, Contact_4=GND, HelpURL=https://www.te.com/usa-en/product-292303-5.html, id=x0003, Наименование=292303-5, Описание="USB 2.0 Type A гнездо", Производитель="TE Connectivity", Фамилия=Ларионов
X2: library part x0002, "=Описание", Contact_1=RI, Contact_2=TXD, Contact_3=RXD, Contact_4=DSR, Contact_5=GND, Contact_6=DTR, Contact_7=CTS, Contact_8=RTS, Contact_9=DCD, HelpURL=https://www.te.com/global-en/product-1-1740194-2.html, id=x0002, Наименование=1-1740194-2, Описание="D-Sub 9 pin 2,74 мм гнездо", Производитель="TE Connectivity", Фамилия=Ларионов

## Free pads (board coordinates)
  round 4.5 hole 2.2: 2(3,3) 2(3,29)

## Via types
v1: diameter 0.6, hole 0.3, Top Layer to Bottom Layer, tented both sides, 167 vias
v2: diameter 0.6, hole 0.3, Top Layer to Bottom Layer, tented top, 41 vias

## Nets (pads, with @x,y where several pads share a name; then routed paths per layer and width w, separated by ;. In a path a pad name is that pad's centre, name@x,y a point inside that pad or via, vN(x,y) a via of type N, cw(c..) or ccw(c..) an arc to the next point about the centre after c; other vN are vias at no path point)
+5V: C1.1 C2.1 C3.1 C6.1 DD1.1 DD1.19 DD2.10 HL2.2 HL3.2 L1.2 R1.2 R4.2 R5.2 | length 34
  Top Layer w0.15: R1.2@11.828,8.225 11.828,7.731 v1(12.199,7.36) ; L1.2 L1.2@16.615,21.844 ; R4.2@18.034,18.91 R4.2@18.148,18.796 ; v1@23.106,14.232 v1(23.114,14.224) ; C3.1@24.384,22.287 C3.1 ; v1@34.417,6.096 35.417,6.096 35.687,5.826 36.687,5.826 37.344,6.483 37.344,6.978 37.669,7.303 HL2.2@37.719,7.303 ; C6.1@36.378,21.183 C6.1 C6.1@36.748,21.209
  Top Layer w0.2: v1@23.106,14.232 DD1.19 ; v1(24.003,21.336) 24.384,21.717 C3.1@24.384,22.287 ; v1(24.638,27.305) 24.638,26.351 24.511,26.224 24.638,26.097 C1.1 24.576,24.257 C3.1 24.651,22.479 24.742,22.388 24.983,22.388 25.606,21.765 DD1.1
  Top Layer w0.3: R1.2@11.557,8.496 R1.2@11.828,8.225 ; L1.2 L1.2@16.405,22.098 ; v1(17.526,7.493) R5.2@17.526,8.75 ; R4.2@18.034,18.91 v1(18.034,19.939) ; R4.2@18.148,18.796 R4.2@18.148,18.821 ; DD2.10 C6.1@36.378,21.183 ; v1(34.425,6.018) HL3.2@34.425,7.225 ; C6.1@36.748,21.209 v1(38.227,21.209)
  Bottom Layer w0.15: v1(23.114,14.224) 21.666,15.672 21.666,20.396 22.606,21.336 v1(24.003,21.336)
  Bottom Layer w0.2: v1@23.856,21.189 v1(24.003,21.336)
  other v1: 18.034,21.844 19.558,21.844 18.796,22.225 18.034,22.733 19.558,22.733 18.796,23.114 18.034,23.622 19.558,23.622
CH_5V_IN: VD2.2 X1.1 | length 5.9
  Top Layer w0.15: X1.1 X1.1@9.482,21.463
  Top Layer w0.3: X1.1@9.482,21.463 10.541,21.463 12.897,23.819 VD2.2@12.897,24.566
CH_D_N: DD1.15 VD1.2 X1.2 | length 21.9
  Top Layer w0.155: X1.2 9.771,17.558 11.703,17.558 12.49,16.77 12.49,14.992 12.907,14.575 14.725,14.575 14.725,15.881 14.634,15.972 13.754,15.972 13.652,16.074 13.874,16.296 14.609,16.296 14.699,16.387 14.699,16.642 15.291,17.233 16.398,17.233 17.026,17.862 17.866,17.862 18.18,17.548 18.18,17.293 18.449,17.024 v1(18.535,17.024) ; v1(20.186,16.262) 20.186,16.264 20.54,16.617 20.794,16.617 20.798,16.621 21.033,16.621 21.13,16.524 DD1.15
  Bottom Layer w0.155: v1(18.535,17.024) 18.449,17.024 18.18,17.293 18.18,17.422 18.314,17.557 18.756,17.557 19.101,17.211 19.101,17.178 19.662,16.617 19.917,16.617 20.186,16.348 v1(20.186,16.262)
CH_D_P: DD1.14 VD1.3 X1.3 | length 21.9
  Top Layer w0.155: X1.3 9.771,17.252 11.576,17.252 12.185,16.644 12.185,14.866 12.872,14.179 14.761,14.179 15.03,14.448 15.03,15.881 15.121,15.972 15.95,15.972 16.052,16.074 15.83,16.296 15.095,16.296 15.005,16.387 15.005,16.516 15.417,16.928 16.524,16.928 17.153,17.557 17.74,17.557 17.874,17.422 17.874,17.293 17.605,17.024 v1(17.519,17.024) ; v1(20.186,17.278) v1(20.186,17.278) 20.54,16.923 20.668,16.923 20.672,16.927 21.033,16.927 21.13,17.024 DD1.14
  Bottom Layer w0.155: v1(17.519,17.024) 17.605,17.024 17.874,17.293 17.874,17.548 18.188,17.862 18.882,17.862 19.406,17.338 19.406,17.305 19.788,16.923 19.917,16.923 20.186,17.192 v1(20.186,17.278)
CH_RXD: R6.2 X2.3 | length 4.9
  Top Layer w0.15: R6.2@38.614,14.23 40.433,14.23 42.351,16.148 X2.3@42.701,16.148
CH_TXD: R7.2 X2.2 | length 6.9
  Top Layer w0.15: R7.2@38.614,15.881 38.62,15.875 v1(40.132,15.875) ; v1(40.132,13.462) 40.159,13.435 42.899,13.435 42.926,13.408 X2.2@42.853,13.335
  Bottom Layer w0.15: v1(40.132,13.462) v1(40.132,15.875)
GND: C1.2 C2.2 C3.2 C4.2 C5.1 C6.2 C7.2 DD1.0 DD1.4 DD1.17 DD1.20 DD1.24 DD1.26 DD2.1 HL1.1 S1.1 VD1.1 X1.4 X1.TP1 X2.5 X2.TP1 | length 12.1
  Top Layer w0.15: DD1.17 22.106,16.024 DD1.0@23.606,17.524 ; DD1.20 DD1.0@23.606,17.524 ; DD1.4@24.087,20.193 DD1.4 24.106,18.024 DD1.0 ; DD1.24 25.606,16.024 DD1.0@25.106,16.524 ; DD1.26 DD1.0@25.106,16.524 ; DD1.0@23.606,17.524 DD1.0 ; DD1.0 DD1.0@25.106,16.524
  other v1: 6.359,1.326 8.859,1.326 11.359,1.326 13.859,1.326 16.359,1.326 18.859,1.326 21.359,1.326 23.859,1.326 26.359,1.326 28.859,1.326 31.359,1.326 33.859,1.326 36.359,1.326 38.859,1.326 7.609,3.826 10.109,3.826 12.609,3.826 15.109,3.826 17.609,3.826 20.109,3.826 22.609,3.826 25.109,3.826 27.609,3.826 30.109,3.826 32.609,3.826 35.109,3.826 37.609,3.826 40.109,3.826 1.359,6.326 3.859,6.326 6.359,6.326 8.859,6.326 11.359,6.326 13.859,6.326 16.359,6.326 18.859,6.326 21.359,6.326 23.859,6.326 26.359,6.326 28.859,6.326 31.359,6.326 36.359,6.326 38.859,6.326 41.359,6.326 2.609,8.826 10.109,8.826 15.109,8.826 22.609,8.826 25.109,8.826 27.609,8.826 30.109,8.826 32.609,8.826 40.109,8.826 42.609,8.826 45.109,8.826 47.609,8.826 50.109,8.826 1.359,11.326 8.859,11.326 11.359,11.326 13.859,11.326 16.359,11.326 18.859,11.326 23.859,11.326 26.359,11.326 28.859,11.326 36.359,11.326 38.859,11.326 41.359,11.326 48.859,11.326 2.609,13.826 5.109,13.826 7.609,13.826 17.609,13.826 20.109,13.826 45.109,13.826 50.109,13.826 1.359,16.326 3.859,16.326 6.359,16.326 11.359,16.326 41.359,16.326 48.859,16.326 2.609,18.826 5.109,18.826 7.609,18.826 12.609,18.826 32.609,18.826 37.609,18.826 40.109,18.826 45.109,18.826 47.609,18.826 50.109,18.826 1.359,21.326 3.859,21.326 6.359,21.326 11.359,21.326 21.359,21.326 31.359,21.326 41.359,21.326 46.359,21.326 48.859,21.326 2.609,23.826 10.109,23.826 15.109,23.826 30.109,23.826 32.609,23.826 35.109,23.826 40.109,23.826 42.609,23.826 50.109,23.826 1.359,26.326 3.859,26.326 8.859,26.326 11.359,26.326 13.859,26.326 16.359,26.326 18.859,26.326 21.359,26.326 28.859,26.326 31.359,26.326 33.859,26.326 36.359,26.326 38.859,26.326 7.609,28.826 10.109,28.826 12.609,28.826 15.109,28.826 17.609,28.826 20.109,28.826 22.609,28.826 25.109,28.826 27.609,28.826 30.109,28.826 32.609,28.826 35.109,28.826 37.609,28.826 40.109,28.826
  other v2: 43.434,1.651 45.339,1.651 47.244,1.651 49.149,1.651 43.434,2.921 45.339,2.921 47.244,2.921 49.149,2.921 43.434,4.191 45.339,4.191 47.244,4.191 49.149,4.191 43.434,5.461 45.339,5.461 47.244,5.461 49.149,5.461 22.834,16.769 23.85,16.769 24.866,16.769 22.834,17.785 23.85,17.785 24.866,17.785 22.834,18.801 23.85,18.801 24.866,18.801 43.434,27.051 45.339,27.051 47.244,27.051 49.149,27.051 43.434,28.321 45.339,28.321 47.244,28.321 49.149,28.321 43.434,29.591 45.339,29.591 47.244,29.591 49.149,29.591 43.434,30.861 45.339,30.861 47.244,30.861 49.149,30.861
NetC4_1: C4.1 DD1.16 | length 2.7
  Top Layer w0.15: C4.1 20.162,14.865 20.649,15.352 20.649,15.517 21.156,16.024 DD1.16
NetC5_2: C5.2 DD2.3 | length 5.6
  Top Layer w0.15: C5.2@27.171,23.12 C5.2 27.276,23.12 27.276,20.984 28.061,20.199 29.695,20.199 DD2.3 DD2.3@29.161,20.183
NetC8_1: C8.1 DD2.9 | length 7.2
  Top Layer w0.15: C8.1@33.229,16.891 33.356,16.764 v1(34.798,16.764) ; DD2.9 34.218,20.676 35.027,20.676 35.814,19.888 v1(35.814,19.812) v1@35.692,19.812
  Bottom Layer w0.15: v1(34.798,16.764) 34.798,17.399 35.814,18.415 v1(35.814,19.812)
NetC8_2: C8.2 DD2.2 | length 7.5
  Top Layer w0.15: v1(28.321,20.955) 28.443,20.955 28.715,20.683 DD2.2 DD2.2@29.691,20.703 ; v1(29.083,17.018) C8.2
  Bottom Layer w0.15: v1(28.321,20.955) 28.321,20.193 28.575,19.939 28.575,17.526 v1(29.083,17.018)
NetDD1_11: DD1.11 R4.1 | length 2
  Top Layer w0.15: R4.1@19.691,19.056 19.691,19.031 20.041,18.681 20.972,18.681 21.129,18.524 DD1.11
NetDD2_6: DD2.6 R6.1 | length 6.7
  Top Layer w0.15: DD2.6 34.617,19.183 34.686,19.114 34.686,17.856 36.068,16.474 36.068,14.986 36.449,14.605 36.714,14.605 37.064,14.255 37.064,14.23 R6.1@36.943,14.351
NetDD2_7: DD2.7 R7.1 | length 5.5
  Top Layer w0.15: DD2.7 35.136,19.683 35.306,19.513 35.306,17.664 37.064,15.906 R7.1@37.064,15.881
NetHL1_2: HL1.2 R1.1 | length 1.7
  Top Layer w0.15: R1.1@11.557,10.046 13.214,10.046 HL1.2@13.259,10.001
NetHL2_1: HL2.1 R2.2 | length 1.6
  Top Layer w0.15: HL2.1@37.719,8.953 R2.2@37.719,10.528
NetHL3_1: HL3.1 R3.2 | length 1.6
  Top Layer w0.15: HL3.1@34.417,8.953 R3.2@34.417,10.528
NetL1_1: L1.1 VD1.4 VD2.1 | length 8.7
  Top Layer w0.15: VD1.4@15.852,17.974 16.052,17.974 VD1.4@16.383,17.974
  Top Layer w0.3: VD2.1 14.93,21.166 15.367,20.729 15.367,19.431 15.852,18.946 VD1.4@15.852,17.974 ; VD1.4@16.383,17.974 L1.1
RESET: C7.1 DD1.18 R5.1 S1.2 | length 17.6
  Top Layer w0.15: R5.1@17.526,10.3 19.356,10.3 C7.1 19.431,10.3 19.856,10.725 19.931,10.725 21.077,11.871 22.099,11.871 S1.2@22.374,12.146 ; S1.2@22.479,12.446 S1.2@31.579,12.446 ; S1.2@22.606,12.573 DD1.18
RXD: DD1.2 DD2.5 | length 7
  Top Layer w0.15: v1(24.892,21.336) 24.892,21.214 25.106,21 DD1.2 DD1.2@25.125,20.193 ; v1(28.067,19.177) 29.705,19.177 DD2.5
  Bottom Layer w0.15: v1(24.892,21.336) 25.908,21.336 v1(28.067,19.177)
RXLED: DD1.22 R2.1 | length 14.8
  Top Layer w0.15: DD1.22 24.625,15.355 24.625,14.745 25.252,14.118 34.523,14.118 36.563,12.078 R2.1
TXD: DD1.30 DD2.4 | length 4
  Top Layer w0.15: DD1.30@26.268,18.536 DD1.30 26.525,18.524 27.684,19.683 DD2.4 DD2.4@29.71,19.684
TXLED: DD1.21 R3.1 | length 12.6
  Top Layer w0.15: DD1.21 24.106,14.724 24.987,13.843 33.528,13.843 34.417,12.954 R3.1
pads on no net: DD1.3 DD1.5 DD1.6 DD1.7 DD1.8 DD1.9 DD1.10 DD1.12 DD1.13 DD1.23 DD1.25 DD1.27 DD1.28 DD1.29 DD1.31 DD1.32 DD2.8 X2. X2.1 X2.4 X2.6 X2.7 X2.8 X2.9
copper on no net:
  other v1: 37.719,6.096

## Polygon pours and split planes (outlines as drawn)
GND on Top Layer "Top Layer-GND" (solid, pour order 72): 0,32.131 51.054,32.131 51.054,0.001 51.053,0 0,0
+5V on Top Layer "Top Layer-+5V" (solid, pour order 26): 15.633,24.13 15.633,21.336 20.066,21.336 20.066,24.13
GND on Top Layer "Top Layer-GND 1" (solid, pour order 48): 61.087,35.306
GND on Top Layer "Top Layer-GND 2" (solid, pour order 32): 8.001,3.683
GND on Top Layer "Top Layer-GND 3" (solid, pour order 30): 10.287,3.302
no net on Top Layer "Top Layer-No Net" (solid, pour order 2): 16.637,23.114
no net on Top Layer "Top Layer-No Net 1" (solid, pour order 0): 17.018,22.479
+5V on Signal Layer 2 "Signal Layer 2-+5V 2" (solid, pour order 74): 0,32.131 51.054,32.131 51.054,0.001 0.001,0.001 0,0
+5V on Signal Layer 2 "Signal Layer 2-+5V" (solid, pour order 22): 28.067,34.544
+5V on Signal Layer 2 "Signal Layer 2-+5V 1" (solid, pour order 20): 26.543,21.59
GND on Bottom Layer "Bottom Layer-GND" (solid, pour order 66): 0,32.131 0,0 51.053,0 51.054,0.001 51.054,32.131
GND on Bottom Layer "Bottom Layer-GND 1" (solid, pour order 38): 50.419,32.131
GND on Signal Layer 1 "Signal Layer 1-GND" (solid, pour order 68): 0,32.131 0,0 0.001,0.001 51.054,0.001 51.054,32.131 51.054,32.001

## Silkscreen, mask and mechanical layers (free items; w line width, h text height)
Top Overlay:
  text "PWR" at 10.859,5.601 h1.2
  text "TXD" at 33.359,4.376 h1.2
  text "RXD" at 36.984,4.376 h1.2
  text ".designation" at 6.884,1.076 h2
Bottom Overlay:
  text ".pcb_dec_number" at 23.009,1.151 h2
Board:
  lines w0.254: 0,8.033 0,24.098 0,32.131 51.054,32.131 51.054,0 0,0 0,8.033 ; 0,8.033 0,8.033
Assembly Notes (Mech5):
  text "'.title'" at -0.441,-2.449 h2
  text "'.project'_'.pcb_dec_number'['.Pcb_File_Name_No_Path']" at -0.381,-5.588 h2